# Altium PCB BUS_Board.PcbDoc
Units mil, origin at the board's own origin, x right, y up, seen from the top; angles counter-clockwise.
Board outline 7401.57 x 2047.24 mil, 2 copper layers (Top Layer, Bottom Layer); 31 components, 15 nets, 149 pads, 312 vias.
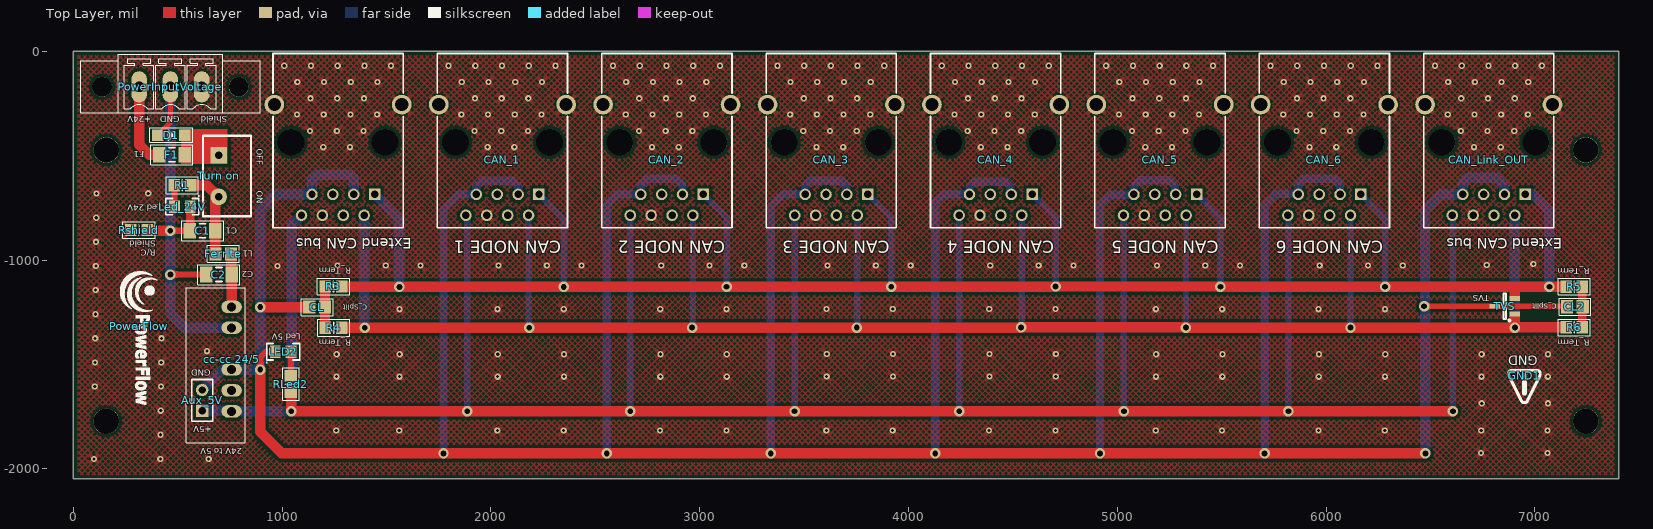
[diagram p0: Top Layer view]
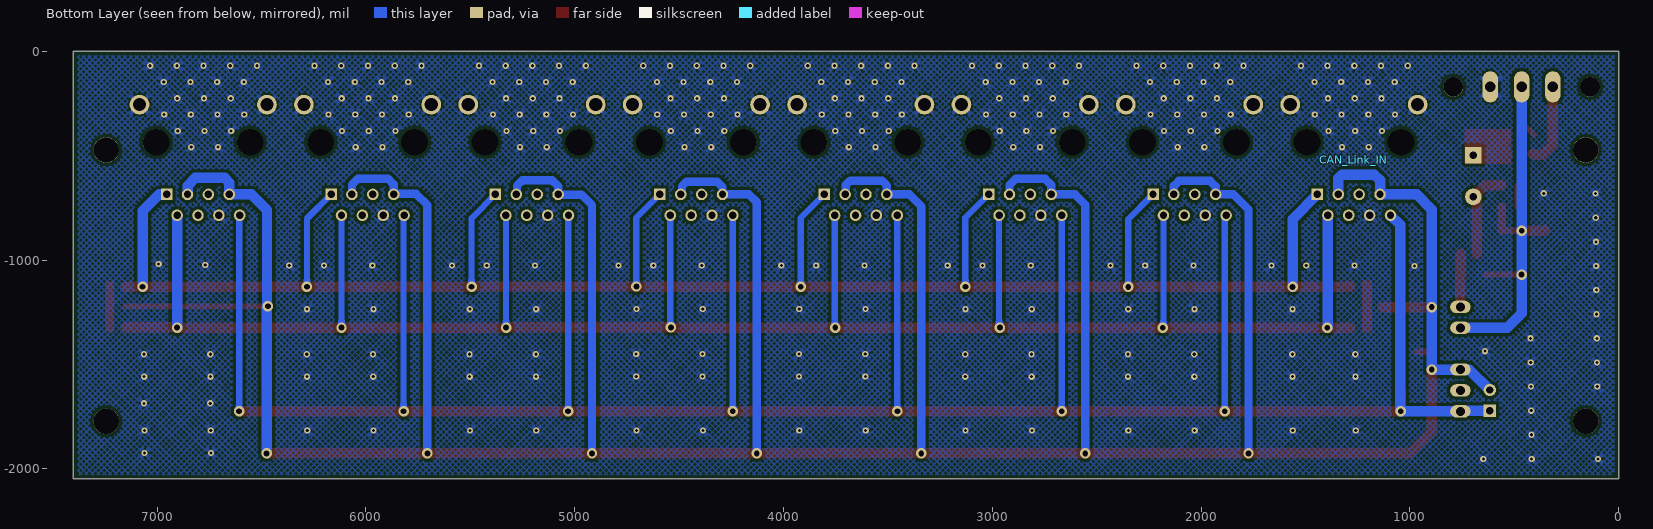
[diagram p1: Bottom Layer view, seen from below]

## Layer stack, top to bottom
Top Solder: solder mask 0.4, Solder Resist, Dk 3.5
Top Layer: signal copper 1.4
Dielectric 1: core 12.6, FR-4, Dk 4.8
Bottom Layer: signal copper 1.4
Bottom Solder: solder mask 0.4, Solder Resist, Dk 3.5

## Board outline
0,-2047.24 0,0 7401.57,0 7401.57,-2047.24

## Design rules (kind name [scope] priority, off if disabled: settings)
BoardOutlineClearance [All] p1: gap=15 ignorepadtopadclearanceinfootprint=FALSE except(0: Arc-SplitContinuation Track-SplitContinuation SMDPad-SplitContinuation THPad-SplitContinuation Via-SplitContinuation Fill-SplitContinuation Poly-SplitContinuation Region-SplitContinuation Text-SplitContinuation)
Clearance Clearance-xPP-xTP-xTT [All] p1: gap=15 ignorepadtopadclearanceinfootprint=FALSE except(0: Arc-Hole Track-Hole SMDPad-Hole THPad-Hole Via-Hole Fill-Hole Poly-Hole Region-Hole Text-Hole)
ComponentClearance [All] p1: gap=9.84 collisioncheckmode=3 verticalgap=9.84 showdistances=FALSE
DiffPairsRouting [All] p1: maxlimit=9.84 minlimit=9.84 mostfreqgap=9.84 toplayer_minwidth=15 toplayer_maxwidth=15 toplayer_prefwidth=15 bottomlayer_minwidth=15 bottomlayer_maxwidth=15 bottomlayer_prefwidth=15 maxuncoupledlength=492.13
Height [All] p1: minheight=0 maxheight=984.25 prefheight=492.13
HoleSize HoleSize-PTH [All] p1: absolutevalues=TRUE maxlimit=236.22 minlimit=10 maxpercent=80.000 minpercent=20.000
HoleToHoleClearance [All] p1: gap=15 allowstackedmicrovias=TRUE
MinimumAnnularRing "Minimum IAR  >0.45mm" [((ObjectKind = 'Pad') OR (ObjectKind = 'Via')) And (Layer = 'MultiLayer') And (HoleDiameter > AsMM(0.45))] p1: minimumring=6.89 // minimum inner annular ring for pads > 0.45mm finished hole size
MinimumAnnularRing "Minimum IAR <=0.45mm" [((ObjectKind = 'Pad') OR (ObjectKind = 'Via')) And (Layer = 'MultiLayer') And (HoleDiameter <= AsMM(0.45))] p2: minimumring=6.89 // minimum inner annular ring for pads <= 0.45mm finished hole size
MinimumSolderMaskSliver [All] p1: minsoldermaskwidth=2
PlaneClearance PlaneClearance-IPI [All] p1: clearance=9.84
PlaneConnect [All] p1: planeconnectstyle=Relief reliefexpansion=25 reliefentries=4 reliefconductorwidth=25 reliefairgap=7.87
PolygonConnect PolygonConnect-xTW [All] p1: connectstyle=Relief reliefconductorwidth=19.68 reliefentries=4 polygonreliefangle="45 Angle" airgapwidth=7.87
RoutingCorners [All] p1: cornerstyle=45-Degree minsetback=98.43 maxsetback=98.43
RoutingVias "RoutingVias > 0.45mm" [(ObjectKind = 'Via') And (HoleDiameter > AsMM(0.45))] p1: holewidth=19.68 width=33.46 viastyle="Through Hole" minholewidth=10 minwidth=25 maxholewidth=35.43 maxwidth=55 // finishet hole size > 0.45mm
RoutingVias "RoutingVias <= 0.45mm" [(ObjectKind = 'Via') And (HoleDiameter <= AsMM(0.45))] p2: holewidth=11.81 width=25.59 viastyle="Through Hole" minholewidth=9.84 minwidth=23.62 maxholewidth=30 maxwidth=40 // finishet hole size <= 0.45mm
SilkToSilkClearance [All] p1: silktosilkclearance=5
SilkToSolderMaskClearance SilkscreenOverComponentPads [IsPad] p1: minsilkscreentomaskgap=2 clearancetoexposedcopper=TRUE
SolderMaskExpansion [All] p1: expansion=0
UnRoutedNet [All] p1: checkbadconnections=TRUE
Width Width-xTW [All] p1: maxlimit=59.06 minlimit=5.91 preferedwidth=20
18 further rules are at their usual default settings.

## Components (designator, comment, footprint, x,y, rotation, side; value= is the part's Value field where it differs from the comment)
Aux_5V "Header 2" HDR1X2 617,-1722 r90 top
C1 "Capacitor" CAPC_1206 619,-859 r0 top value=10uF
C2 "Capacitor" CAPC_1206 697,-1069 r0 top value=10uF
CAN_1 "61500814221" 61500814221#1 2055.26,-427.39 r180 top
CAN_2 "61500814221" 61500814221#1 2842.66,-427.39 r180 top
CAN_3 "61500814221" 61500814221#1 3630.06,-427.39 r180 top
CAN_4 "61500814221" 61500814221#1 4417.46,-427.39 r180 top
CAN_5 "61500814221" 61500814221#1 5204.87,-427.39 r180 top
CAN_6 "61500814221" 61500814221#1 5992.27,-427.39 r180 top
CAN_Link_IN "61500814221" 61500814221#2 1267.86,-427.39 r180 bottom
CAN_Link_OUT "61500814221" 61500814221#1 6779.67,-427.39 r180 top
"cc-cc 24/5" "PCN2-S24-S5-S" PCN2-S 758,-1224 r270 top
CL "Capacitor" CAPC_0805 1168,-1225 r180 top value="4.7 nF"
CL2 "Capacitor" CAPC_0805 7192,-1223 r180 top value="4.7 nF"
D1 "Diode" Diode_SOD-123 464,-401 r0 top
F1 "fuse" fuse_1206 472,-496 r180 top
Ferrite "Ferrite Bead" FERR_0805 718,-970 r0 top value="5.6 uH"
GND1 "Logotipo" Dangerous_Logo 6950,-1553 r180 top
LED2 "Green" CD2012-0805 1005,-1439 r180 top
Led_24V "Green" CD2012-0805 522,-744 r0 top
PowerFlow "Logotipo" PowerFlow_LOGO 316,-1316 r270 top
PowerInputVoltage "con-phoenix-3" MCV3-LOCK 464.83,-170 r0 top
R1 "1k5" RESC_0805 522,-641 r0 top
R3 "60" RESC_0805 1246,-1126 r0 top
R4 "60" RESC_0805 1247,-1324 r0 top
R5 "60" RESC_0805 7189,-1127 r180 top
R6 "60" RESC_0805 7189,-1322 r180 top
RLed2 "470" RESC_0805 1042,-1594 r90 top
Rshield "0" RESC_0805 314,-856 r0 top
"Turn on" "switch_single" SW-1-A11J 735.37,-597 r270 top
TVS "Diode_TVS_Array" SOT23-3 6856,-1221 r180 top value=SM24CANB-02HTG

## Footprints (in the part's own frame and the unit in brackets; to place one, negate y for a bottom-side part, rotate by r counter-clockwise, add the part's x,y. Pads: shape width x height; smd on the part's side, far side on the other; paste and mask are expansions set on the pad)
61500814221#1 [mm] "Modular Jack Horizontal Shielded 8P8C Tab Down"
  rect 1.4x1.4 hole 0.9: 1(-4.445,6.55)
  round 1.4 hole 0.9: 2(-3.175,9.09) 3(-1.905,6.55) 4(-0.635,9.09) 5(0.635,6.55) 6(1.905,9.09) 7(3.175,6.55) 8(4.445,9.09)
  round 3.15 hole 3.25 unplated: MH1(-5.715,0.2) MH2(5.715,0.2)
  round 2.4 hole 1.6: S1(-7.75,-4.37) S2(7.75,-4.37)
  silkscreen extent -7.92,-10.6 7.92,10.6, body extent -7.9,-10.6 7.9,10.6, height 13.7
61500814221#2 [mm] "Modular Jack Horizontal Shielded 8P8C Tab Down"
  rect 1.4x1.4 hole 0.9: 1(-4.445,-6.55)
  round 1.4 hole 0.9: 2(-3.175,-9.09) 3(-1.905,-6.55) 4(-0.635,-9.09) 5(0.635,-6.55) 6(1.905,-9.09) 7(3.175,-6.55) 8(4.445,-9.09)
  round 3.15 hole 3.25 unplated: MH1(-5.715,-0.2) MH2(5.715,-0.2)
  round 2.4 hole 1.6: S1(-7.75,4.37) S2(7.75,4.37)
  body extent -7.9,-10.6 7.9,10.6, height 13.7
CAPC_0805 [mm] "Chip Capacitor, Body 2.0x1.3mm, IPC Low Density"
  rect 1.5x1.6 smd: 1(-0.95,0) 2(0.95,0)
  silkscreen extent -1.93,-1.03 1.93,1.03, body extent -1.1,-0.72 1.1,0.72, height 1.1
CAPC_1206 [mm] "Chip Capacitor, Body 3.2x1.6mm, IPC Low Density"
  rect 1.5x1.9 smd: 1(-1.55,0) 2(1.55,0)
  silkscreen extent -2.57,-1.21 2.57,1.21, body extent -1.7,-0.9 1.7,0.9, height 1.35
CD2012-0805 [mm] "Chip Diode; Body 2.0 x 1.3 mm (LxW typ)"
  rect 1.3x1.5 smd: A(-0.95,0) C(0.95,0)
  silkscreen extent -2,-1 2.04,1.34, body extent -1.05,-0.67 1.05,0.68, height 0.9
Dangerous_Logo [mil] "Micro Logotipo 15x15mm"
  silkscreen extent -82,-30 82,133
Diode_SOD-123 [mil]
  rect 55x55 smd: 1(-60,0) 2(70,0)
  silkscreen extent -98,-35 108,35, body extent -70,-31 76,32, height 50
FERR_0805 [mm] "Ferrite Bead 0805"
  rect 1.5x1.6 smd: 1(-0.95,0) 2(0.95,0)
  silkscreen extent -1.93,-1.03 1.93,1.03, body extent -1.1,-0.72 1.1,0.72, height 1.1
fuse_1206 [mm]
  rect 1.5x1.9 smd: 1(-1.55,0) 2(1.55,0)
  silkscreen extent -2.57,-1.21 2.57,1.21, body extent -1.7,-0.9 1.7,0.9, height 1.35
HDR1X2 [mm] "Connector; Header; 2 Position"
  rect 1.5x1.5 hole 0.9: 1(0,0)
  round 1.5 hole 0.9: 2(2.54,0)
  silkscreen extent -1.27,-1.27 3.81,1.27
MCV3-LOCK [mil]
  round 94.49 hole 94.49: 0(-327.17,0) 0(327.17,0)
  oval 75x150 hole 50: 1(-150,0) 2(0,0) 3(150,0)
  silkscreen extent -430,-125 430,155, body extent -430,-125 430,160, height 362
PCN2-S [mm]
  oval 1.5x2.5 hole 1.1: 1(0,0) 2(2.54,0) 4(7.62,0) 5(10.16,0) 6(12.7,0)
  silkscreen extent -2.3,-5.52 16.5,1.68
PowerFlow_LOGO [mil] "16.5 x 6.5 mm"
  silkscreen extent -262,-90 377,87
RESC_0805 [mm] "Chip Resistor, Body 2.0x1.3mm, IPC Low Density"
  rect 1.4x1.5 smd: 1(-1,0) 2(1,0)
  silkscreen extent -1.96,-1.01 1.96,1.01, body extent -1.07,-0.7 1.08,0.7, height 0.65
SOT23-3 [mm] "SOT23, 3"
  rect 1.3x0.6 smd mask+0.05: 1(-1.2,0.95) 2(-1.2,-0.95) 3(1.2,0)
  silkscreen extent -0.7,-1.55 0.15,1.85, body extent -1.32,-1.46 1.15,1.46, height 1
SW-1-A11J [mil]
  rect 80x80 hole 35.43: 1(-100,-39.37)
  round 80 hole 35.43: 2(100,-39.37)
  silkscreen extent -193,-115 193,115, body extent -193,-119 193,111, height 898

## Part data
Aux_5V: "Header, 2-Pin", LatestRevisionDate=17-Jul-2002, LatestRevisionNote="Re-released for DXP Platform.", Publisher="Altium Limited"
C1 C2: Voltage="50 V"
CAN_1 CAN_2 CAN_3 CAN_4 CAN_5 CAN_6 CAN_Link_IN CAN_Link_OUT: "Modular Jack Horizontal Shielded 8P8C Tab Down WR-MJ", Rated Current="1.5 A", Withstanding Voltage="1000 VAC", Working Voltage="120 VAC", ComponentLink1Description=Manufacturer, ComponentLink1URL=http://www.we-online.de, ComponentLink2Description=Datasheet, ComponentLink2URL=http://katalog.we-online.com/em/datasheet/61500814221.pdf, Entrance=Horizontal, Part Number=61500814221, Pin Number=8P8C, Port=1x1, Published Date="September 2017", Publisher="Wurth Elektronik"
LED2 Led_24V: library part LED_GREEN, "LED 2X1.2MM 570NM GN WTR CLR SMD", Manufacturer=Kingbright, MPN=APT2012CGCK, Vendor=Digikey, VPN=754-1127-1-ND
R1: "Thick film resistor, SMD 0402, 1/16W, 1%", Manufacturer=Generic
R3 R4 R5 R6 RLed2 Rshield: library part R2, "Thick film resistor, SMD 0402, 1/16W, 1%", Manufacturer=Generic

## Free pads (board coordinates)
  round 122.05 hole 122.05 unplated: ""(157.48,-1771.65) ""(157.48,-472.44) ""(7244.09,-1771.65) ""(7244.09,-472.44)

## Via types
v1: diameter 30, hole 15, Top Layer to Bottom Layer, 276 vias
v2: diameter 50, hole 28, Top Layer to Bottom Layer, 36 vias

## Nets (pads, with @x,y where several pads share a name; then routed paths per layer and width w, separated by ;. In a path a pad name is that pad's centre, name@x,y a point inside that pad or via, vN(x,y) a via of type N, cw(c..) or ccw(c..) an arc to the next point about the centre after c; other vN are vias at no path point)
5V2: "cc-cc 24/5.6" Aux_5V.1 CAN_1.8 CAN_2.8 CAN_3.8 CAN_4.8 CAN_5.8 CAN_6.8 CAN_Link_IN.8 CAN_Link_OUT.8 RLed2.1 | length 13617
  Top Layer w50: RLed2.1 1044,-1635.37 v2(1044,-1724) 1044.54,-1723.46 v2(1886.95,-1723.46) ; v2@1888.13,-1723.46 v2(2667.66,-1723.46) v2(3454.87,-1723.46) v2(4243.25,-1723.46) v2(5031.64,-1723.46) v2(5820.02,-1723.46) v2(6607.43,-1723.46)
  Bottom Layer w30: CAN_1.8 1886.95,-791.96 v2(1886.95,-1723.46) v2@1886.95,-1724.64 ; v2@2666.48,-1724.64 v2(2667.66,-1723.46) CAN_2.8 ; v2@3454.87,-1724.64 3455.06,-1724.44 CAN_3.8 ; CAN_4.8 4243.25,-786.06 v2(4243.25,-1723.46) ; CAN_5.8 5031.64,-787.04 v2(5031.64,-1723.46) ; CAN_6.8 5820.02,-788.02 v2(5820.02,-1723.46) ; CAN_Link_OUT.8 6607.43,-788.02 v2(6607.43,-1723.46)
  Bottom Layer w50: Aux_5V.1 756,-1722 758,-1724 v2(1044,-1724) ; v2@1047,-1724 1047,-831.13 CAN_Link_IN.8
+24V: "Turn on.2" C1.2 Ferrite.1 R1.2 | length 437.7
  Top Layer w50: R1.2 640,-641 696,-697 680.02,-712.98 C1.2 680.6,-859.57 Ferrite.1
CAN_H: CAN_1.1 CAN_2.1 CAN_3.1 CAN_4.1 CAN_5.1 CAN_6.1 CAN_Link_IN.1 CAN_Link_OUT.1 R3.2 R5.2 TVS.2 | length 9804.2
  Top Layer w50: R3.2 1287.35,-1127.98 v2(1561.36,-1127.98) v2(2348.76,-1127.98) 3128.29,-1127.98 v2(3129.08,-1127.2) v2(3917.46,-1127.2) 4704.28,-1127.2 v2(4705.06,-1126.41) 5493.45,-1126.41 v2(5494.24,-1127.2) v2(6282.62,-1127.2) v2(7070.02,-1127.2) 7149.43,-1127.2 R5.2
  Bottom Layer w30: CAN_1.1 2348.76,-803.77 v2(2348.76,-1127.98) ; CAN_2.1 3129.08,-796.68 v2(3129.08,-1127.2) ; CAN_3.1 3917.46,-797.67 v2(3917.46,-1127.2) ; CAN_4.1 4705.06,-797.87 v2(4705.06,-1126.41) ; CAN_5.1 5494.24,-799.64 v2(5494.24,-1127.2) ; CAN_6.1 6282.62,-800.62 v2(6282.62,-1127.2)
  Bottom Layer w50: CAN_Link_IN.1 1561.36,-803.77 v2(1561.36,-1127.98) ; CAN_Link_OUT.1 6991.24,-685.27 7070.02,-764.05 v2(7070.02,-1127.2)
CAN_L: CAN_1.2 CAN_2.2 CAN_3.2 CAN_4.2 CAN_5.2 CAN_6.2 CAN_Link_IN.2 CAN_Link_OUT.2 R4.2 R6.2 TVS.1 | length 10174.9
  Top Layer w50: R4.2 1395.86,-1324 v2(1396.01,-1323.85) v2(2183.41,-1323.85) 2962.94,-1323.85 v2(2963.72,-1323.06) v2(3752.11,-1323.06) 4538.92,-1323.06 v2(4539.71,-1322.28) 5328.09,-1322.28 v2(5328.88,-1323.06) v2(6117.27,-1323.06) v2(6904.67,-1323.06) 6905.73,-1322 R6.2
  Bottom Layer w30: CAN_1.2 2180.26,-1320.7 v2(2183.41,-1323.85) ; v2(2963.72,-1323.06) 2967.66,-1319.13 CAN_2.2 ; v2(3752.11,-1323.06) 3755.06,-1320.11 CAN_3.2 ; v2(4539.71,-1322.28) 4542.46,-1319.52 CAN_4.2 ; v2(5328.88,-1323.06) 5329.87,-1322.08 CAN_5.2 ; v2(6117.27,-1323.06) CAN_6.2
  Bottom Layer w50: CAN_Link_IN.2 1392.86,-1320.7 v2(1396.01,-1323.85) ; v2(6904.67,-1323.06) CAN_Link_OUT.2
NetC1_1: "cc-cc 24/5.2" C1.1 C2.1 D1.1 Led_24V.C PowerInputVoltage.2 Rshield.2 | length 2156.2
  Top Layer w25: D1.1 465,-340 465,-170.17 PowerInputVoltage.2
  Top Layer w30: v2(464,-859) C1.1 ; v2(465,-1069) C2.1
  Top Layer w40: C1.1 559.4,-857.57 Led_24V.C
  Top Layer w50: Rshield.2 356.37,-859 v2(464,-859)
  Bottom Layer w50: PowerInputVoltage.2 464,-170.83 v2(464,-859) 465,-860 v2(465,-1069) 464.83,-1069.17 464.83,-1254.83 534,-1324 758,-1324
NetC2_2: "cc-cc 24/5.1" C2.2 Ferrite.2 | length 255.1
  Top Layer w50: Ferrite.2 755.4,-1066.38 C2.2 758.02,-1223.98
NetCL2_1: CL2.1 R5.1 R6.1
NetCL_1: CL.1 R3.1 R4.1 | length 199.4
  Top Layer w30: R3.1 1205.4,-1127.23 CL.1 1207.63,-1227.23 R4.1
NetD1_2: "Turn on.1" D1.2 F1.1 | length 163.4
  Top Layer w50: F1.1 695,-496 696,-497
NetF1_2: F1.2 PowerInputVoltage.1 | length 397.3
  Top Layer w40: F1.2@410.98,-490 F1.2@412,-488.98
  Top Layer w50: PowerInputVoltage.1 314.83,-446.83 364,-496 404.98,-496 F1.2@410.98,-490
NetLED2_A: LED2.A RLed2.2 | length 115.8
  Top Layer w30: RLed2.2 1042,-1439.4 LED2.A
NetLed_24V_A: Led_24V.A R1.1 | length 103.8
  Top Layer w30: R1.1 484.6,-642.97 Led_24V.A
SGND: "cc-cc 24/5.4" Aux_5V.2 CAN_1.3 CAN_1.7 CAN_2.3 CAN_2.7 CAN_3.3 CAN_3.7 CAN_4.3 CAN_4.7 CAN_5.3 CAN_5.7 CAN_6.3 CAN_6.7 CAN_Link_IN.3 CAN_Link_IN.7 CAN_Link_OUT.3 CAN_Link_OUT.7 CL2.2 CL.2 LED2.C TVS.3 | length 20492
  Top Layer w25: v2(6470,-1221) TVS.3 7152.6,-1221 CL2.2
  Top Layer w30: v2(895,-1524) 895,-1465 921,-1439 LED2.C
  Top Layer w50: v2(895,-1524) 895,-1823 998,-1926 v2(1772.78,-1926) ; v2(895,-1225) CL.2 ; v2@1772.78,-1927.39 1774.17,-1926 v2(2555,-1926) v2(3340.69,-1926) v2(4128.29,-1926) v2(4917.46,-1926) v2(5705.85,-1926) v2(6475.98,-1926)
  Bottom Layer w40: v2(1772.78,-1926) 1772.78,-757.12 1844.63,-685.27 CAN_1.7 1930.26,-646.88 1956.83,-620.31 2106.44,-620.31 2130.26,-644.13 CAN_1.3 ; v2@2553.49,-1924.49 v2(2555,-1926) 2555,-736.78 2553.49,-735.27 2603.49,-685.27 CAN_2.7 2717.66,-639.99 2747.19,-610.46 2887.94,-610.46 2917.66,-640.19 CAN_2.3 ; v2@3340.69,-1927.39 v2(3340.69,-1926) 3340.69,-741.37 3396.8,-685.27 CAN_3.7 3505.06,-642.94 3528.69,-619.32 3681.24,-619.32 3701.91,-639.99 3701.91,-682.12 CAN_3.3 ; v2(4128.29,-1926) 4128.29,-722.47 4165.5,-685.27 CAN_4.7 4292.46,-649.83 4318.06,-624.24 4464.71,-624.24 4486.36,-645.9 4486.36,-679.17 CAN_4.3 ; v2@4917.46,-1927.39 v2(4917.46,-1926) 4917.46,-736.45 4967.66,-686.25 5078.88,-686.25 CAN_5.7 5079.87,-645.9 5108.41,-617.35 5251.13,-617.35 5276.72,-642.94 5276.72,-682.12 CAN_5.3 ; v2@5705.85,-1927.39 v2(5705.85,-1926) 5705.85,-736.45 5759.98,-682.31 5864.31,-682.31 CAN_6.7 5867.27,-637.04 5894.83,-609.48 6038.53,-609.48 6067.27,-638.22 CAN_6.3
  Bottom Layer w50: Aux_5V.2 715,-1524 758,-1524 v2(895,-1524) v2(895,-1225) 895,-758 967.73,-685.27 CAN_Link_IN.7 1142.86,-617.14 1170,-590 1325,-590 1342.86,-607.86 CAN_Link_IN.3 ; v2(6475.98,-1926) 6475.98,-1226.98 v2(6470,-1221) 6473.98,-1217.02 6473.98,-760 6548.71,-685.27 CAN_Link_OUT.7 6654.67,-628.31 6676.98,-606 6817.98,-606 6854.67,-642.69 CAN_Link_OUT.3
Shield: CAN_1.6 CAN_1.S1 CAN_1.S2 CAN_2.6 CAN_2.S1 CAN_2.S2 CAN_3.6 CAN_3.S1 CAN_3.S2 CAN_4.6 CAN_4.S1 CAN_4.S2 CAN_5.6 CAN_5.S1 CAN_5.S2 CAN_6.6 CAN_6.S1 CAN_6.S2 CAN_Link_IN.6 CAN_Link_IN.S1 CAN_Link_IN.S2 CAN_Link_OUT.6 CAN_Link_OUT.S1 CAN_Link_OUT.S2 PowerInputVoltage.3 Rshield.1
  other v1: 98.97,-1952.06 416.61,-1952.06 648.11,-1952.06 6742.79,-1923.97 7060.43,-1923.97 417.71,-1836.55 1259.24,-1816.49 1560.98,-1816.48 2030.74,-1816.49 2348.38,-1816.48 2810.26,-1816.49 3127.91,-1816.48 5184.28,-1816.49 5501.92,-1816.48 5963.81,-1816.49 6281.45,-1816.48 6743.33,-1816.49 7060.98,-1816.48 3606.72,-1815.7 3924.36,-1815.7 4386.25,-1815.7 4703.89,-1815.7 418.81,-1721.03 6746,-1686 7063.65,-1686 102.26,-1605.52 419.9,-1605.52 1260.7,-1557.97 1562.43,-1557.97 2032.19,-1557.97 2349.83,-1557.97 2811.71,-1557.97 3129.36,-1557.97 5185.73,-1557.97 5503.38,-1557.97 5965.26,-1557.97 6282.9,-1557.97 6744.79,-1557.97 7062.43,-1557.97 3608.17,-1557.18 3925.82,-1557.18 4387.7,-1557.18 4705.34,-1557.18 103.35,-1490 421,-1490 1261.24,-1450.49 1562.98,-1450.48 2032.74,-1450.49 2350.38,-1450.48 2812.26,-1450.49 3129.91,-1450.48 5186.28,-1450.49 5503.92,-1450.48 5965.81,-1450.49 6283.45,-1450.48 6745.33,-1450.49 7062.98,-1450.48 3608.72,-1449.7 3926.36,-1449.7 4388.25,-1449.7 4705.89,-1449.7 640.5,-1436 104.45,-1374.48 422.1,-1374.48 105.55,-1258.97 1561.6,-1234.68 2031.36,-1234.68 2349,-1234.68 2810.89,-1234.68 3128.53,-1234.68 3607.34,-1233.89 3924.99,-1233.89 4386.87,-1233.89 4704.51,-1233.89 5184.9,-1234.68 5502.55,-1234.68 5964.43,-1234.68 6282.07,-1234.68 106.65,-1143.45 107.74,-1027.94 977.5,-1028 1264.94,-1026 1496.44,-1026 1662.93,-1026 2036.43,-1026 2267.93,-1026 2434.43,-1026 2815.96,-1026 3047.46,-1026 3213.95,-1026 5189.98,-1026 5421.47,-1026 5587.97,-1026 5969.5,-1026 6201,-1026 6367.5,-1026 3612.42,-1025.21 3843.91,-1025.21 4010.41,-1025.21 4391.94,-1025.21 4623.44,-1025.21 4789.94,-1025.21 6770,-1023 6992.99,-1019 108.84,-912.42 109.94,-796.91 111.03,-681.39 358.65,-680 1197,-459 1325,-459 1984.4,-459 2112.4,-459 2771.8,-459 2899.8,-459 3559.2,-459 3687.2,-459 4346.61,-459 4474.61,-459 5134.01,-459 5262.01,-459 5921.41,-459 6049.41,-459 6708.81,-459 6836.81,-459 1134,-381 1262,-381 1390,-381 1921.4,-381 2049.4,-381 2177.4,-381 2708.8,-381 2836.8,-381 2964.8,-381 3496.2,-381 3624.2,-381 3752.2,-381 4283.61,-381 4411.61,-381 4539.61,-381 5071.01,-381 5199.01,-381 5327.01,-381 5858.41,-381 5986.41,-381 6114.41,-381 6645.81,-381 6773.81,-381 6901.81,-381 1071,-303 1199,-303 1327,-303 1455,-303 1858.4,-303 1986.4,-303 2114.4,-303 2242.4,-303 2645.8,-303 2773.8,-303 2901.8,-303 3029.8,-303 3433.2,-303 3561.2,-303 3689.2,-303 3817.2,-303 4220.61,-303 4348.61,-303 4476.61,-303 4604.61,-303 5008.01,-303 5136.01,-303 5264.01,-303 5392.01,-303 5795.41,-303 5923.41,-303 6051.41,-303 6179.41,-303 6582.81,-303 6710.81,-303 6838.81,-303 6966.81,-303 1136,-225 1264,-225 1392,-225 1923.4,-225 2051.4,-225 2179.4,-225 2710.8,-225 2838.8,-225 2966.8,-225 3498.2,-225 3626.2,-225 3754.2,-225 4285.61,-225 4413.61,-225 4541.61,-225 5073.01,-225 5201.01,-225 5329.01,-225 5860.41,-225 5988.41,-225 6116.41,-225 6647.81,-225 6775.81,-225 6903.81,-225 1073,-147 1201,-147 1329,-147 1457,-147 1860.4,-147 1988.4,-147 2116.4,-147 2244.4,-147 2647.8,-147 2775.8,-147 2903.8,-147 3031.8,-147 3435.2,-147 3563.2,-147 3691.2,-147 3819.2,-147 4222.61,-147 4350.61,-147 4478.61,-147 4606.61,-147 5010.01,-147 5138.01,-147 5266.01,-147 5394.01,-147 5797.41,-147 5925.41,-147 6053.41,-147 6181.41,-147 6584.81,-147 6712.81,-147 6840.81,-147 6968.81,-147 1010,-69 1138,-69 1266,-69 1394,-69 1522,-69 1797.4,-69 1925.4,-69 2053.4,-69 2181.4,-69 2309.4,-69 2584.8,-69 2712.8,-69 2840.8,-69 2968.8,-69 3096.8,-69 3372.2,-69 3500.2,-69 3628.2,-69 3756.2,-69 3884.2,-69 4159.61,-69 4287.61,-69 4415.61,-69 4543.61,-69 4671.61,-69 4947.01,-69 5075.01,-69 5203.01,-69 5331.01,-69 5459.01,-69 5734.41,-69 5862.41,-69 5990.41,-69 6118.41,-69 6246.41,-69 6521.81,-69 6649.81,-69 6777.81,-69 6905.81,-69 7033.81,-69
Shield1: 
pads on no net: "cc-cc 24/5.5" CAN_1.4 CAN_1.5 CAN_1.MH1 CAN_1.MH2 CAN_2.4 CAN_2.5 CAN_2.MH1 CAN_2.MH2 CAN_3.4 CAN_3.5 CAN_3.MH1 CAN_3.MH2 CAN_4.4 CAN_4.5 CAN_4.MH1 CAN_4.MH2 CAN_5.4 CAN_5.5 CAN_5.MH1 CAN_5.MH2 CAN_6.4 CAN_6.5 CAN_6.MH1 CAN_6.MH2 CAN_Link_IN.4 CAN_Link_IN.5 CAN_Link_IN.MH1 CAN_Link_IN.MH2 CAN_Link_OUT.4 CAN_Link_OUT.5 CAN_Link_OUT.MH1 CAN_Link_OUT.MH2 PowerInputVoltage.0

## Polygon pours and split planes (outlines as drawn)
Shield on Bottom Layer "Shield_BOT" (hatched 45Degree grid 20 track 8, remove dead copper, pour order 74): 0,0 0,-2047 1,-2048 7401,-2048 7401,1
Shield on Top Layer "Shield_TOP" (hatched 45Degree grid 20 track 8, remove dead copper, pour order 76): 0,0 0,-2047 1,-2048 7401,-2046.67 7401,1

## Other copper
Top Layer:
  rectangle net NetCL_1: 1182,-1346 1229,-1098
  rectangle net NetCL2_1: 7208,-1345 7247,-1102
  rectangle net CAN_L: 6879,-1338 6930,-1248
  rectangle net CAN_H: 6878,-1196 6930,-1123
  rectangle net NetD1_2: 515,-540 739,-371

## Silkscreen, mask and mechanical layers (free items; w line width, h text height)
Top Overlay:
  text "+24V" at 372,-311 h30 r180
  text "GND" at 510,-311 h30 r180
  text "Shield" at 736,-311 h30 r180
  text "OFF" at 879.19,-467.64 h30 r270
  text "F1" at 339,-479 h30 r180
  text "ON" at 879.19,-667.64 h30 r270
  text "Led 24V" at 424,-734 h30 r180
  text "C1" at 784.02,-844 h30 r180
  text "Extend CAN bus" at 1620.19,-895 h50 r180
  text "Extend CAN bus" at 7132,-895 h50 r180
  text "R/C  / Shield" at 394,-906 h30 r180
  text "CAN NODE 1" at 2336,-907 h60 r180
  text "CAN NODE 2" at 3123.4,-907 h60 r180
  text "CAN NODE 3" at 3910.8,-907 h60 r180
  text "CAN NODE 4" at 4698.2,-907 h60 r180
  text "CAN NODE 5" at 5485.61,-907 h60 r180
  text "CAN NODE 6" at 6273.01,-907 h60 r180
  text "L1" at 858.83,-954.42 h30 r180
  text "R_Term" at 1330.63,-1037 h30 r180
  text "R_Term" at 7264,-1038 h30 r180
  text "C2" at 861.45,-1053.43 h30 r180
  text "TVS" at 6781,-1168 h30 r180
  text "C_Split" at 7105,-1209 h25 r180
  text "C_Split" at 1408,-1214 h25 r180
  text "Led 5V" at 1090,-1353 h30 r180
  text "R_Term" at 1330.63,-1381 h30 r180
  text "R_Term" at 7264,-1381 h30 r180
  text "GND" at 7014.95,-1457.64 h45 r180
  text "GND" at 657,-1526 h30 r180
  text "+5V" at 662,-1796 h30 r180
  text "24V to 5V" at 808,-1900 h30 r180